# Allegro board LinkingInterfaceV2_0.brd
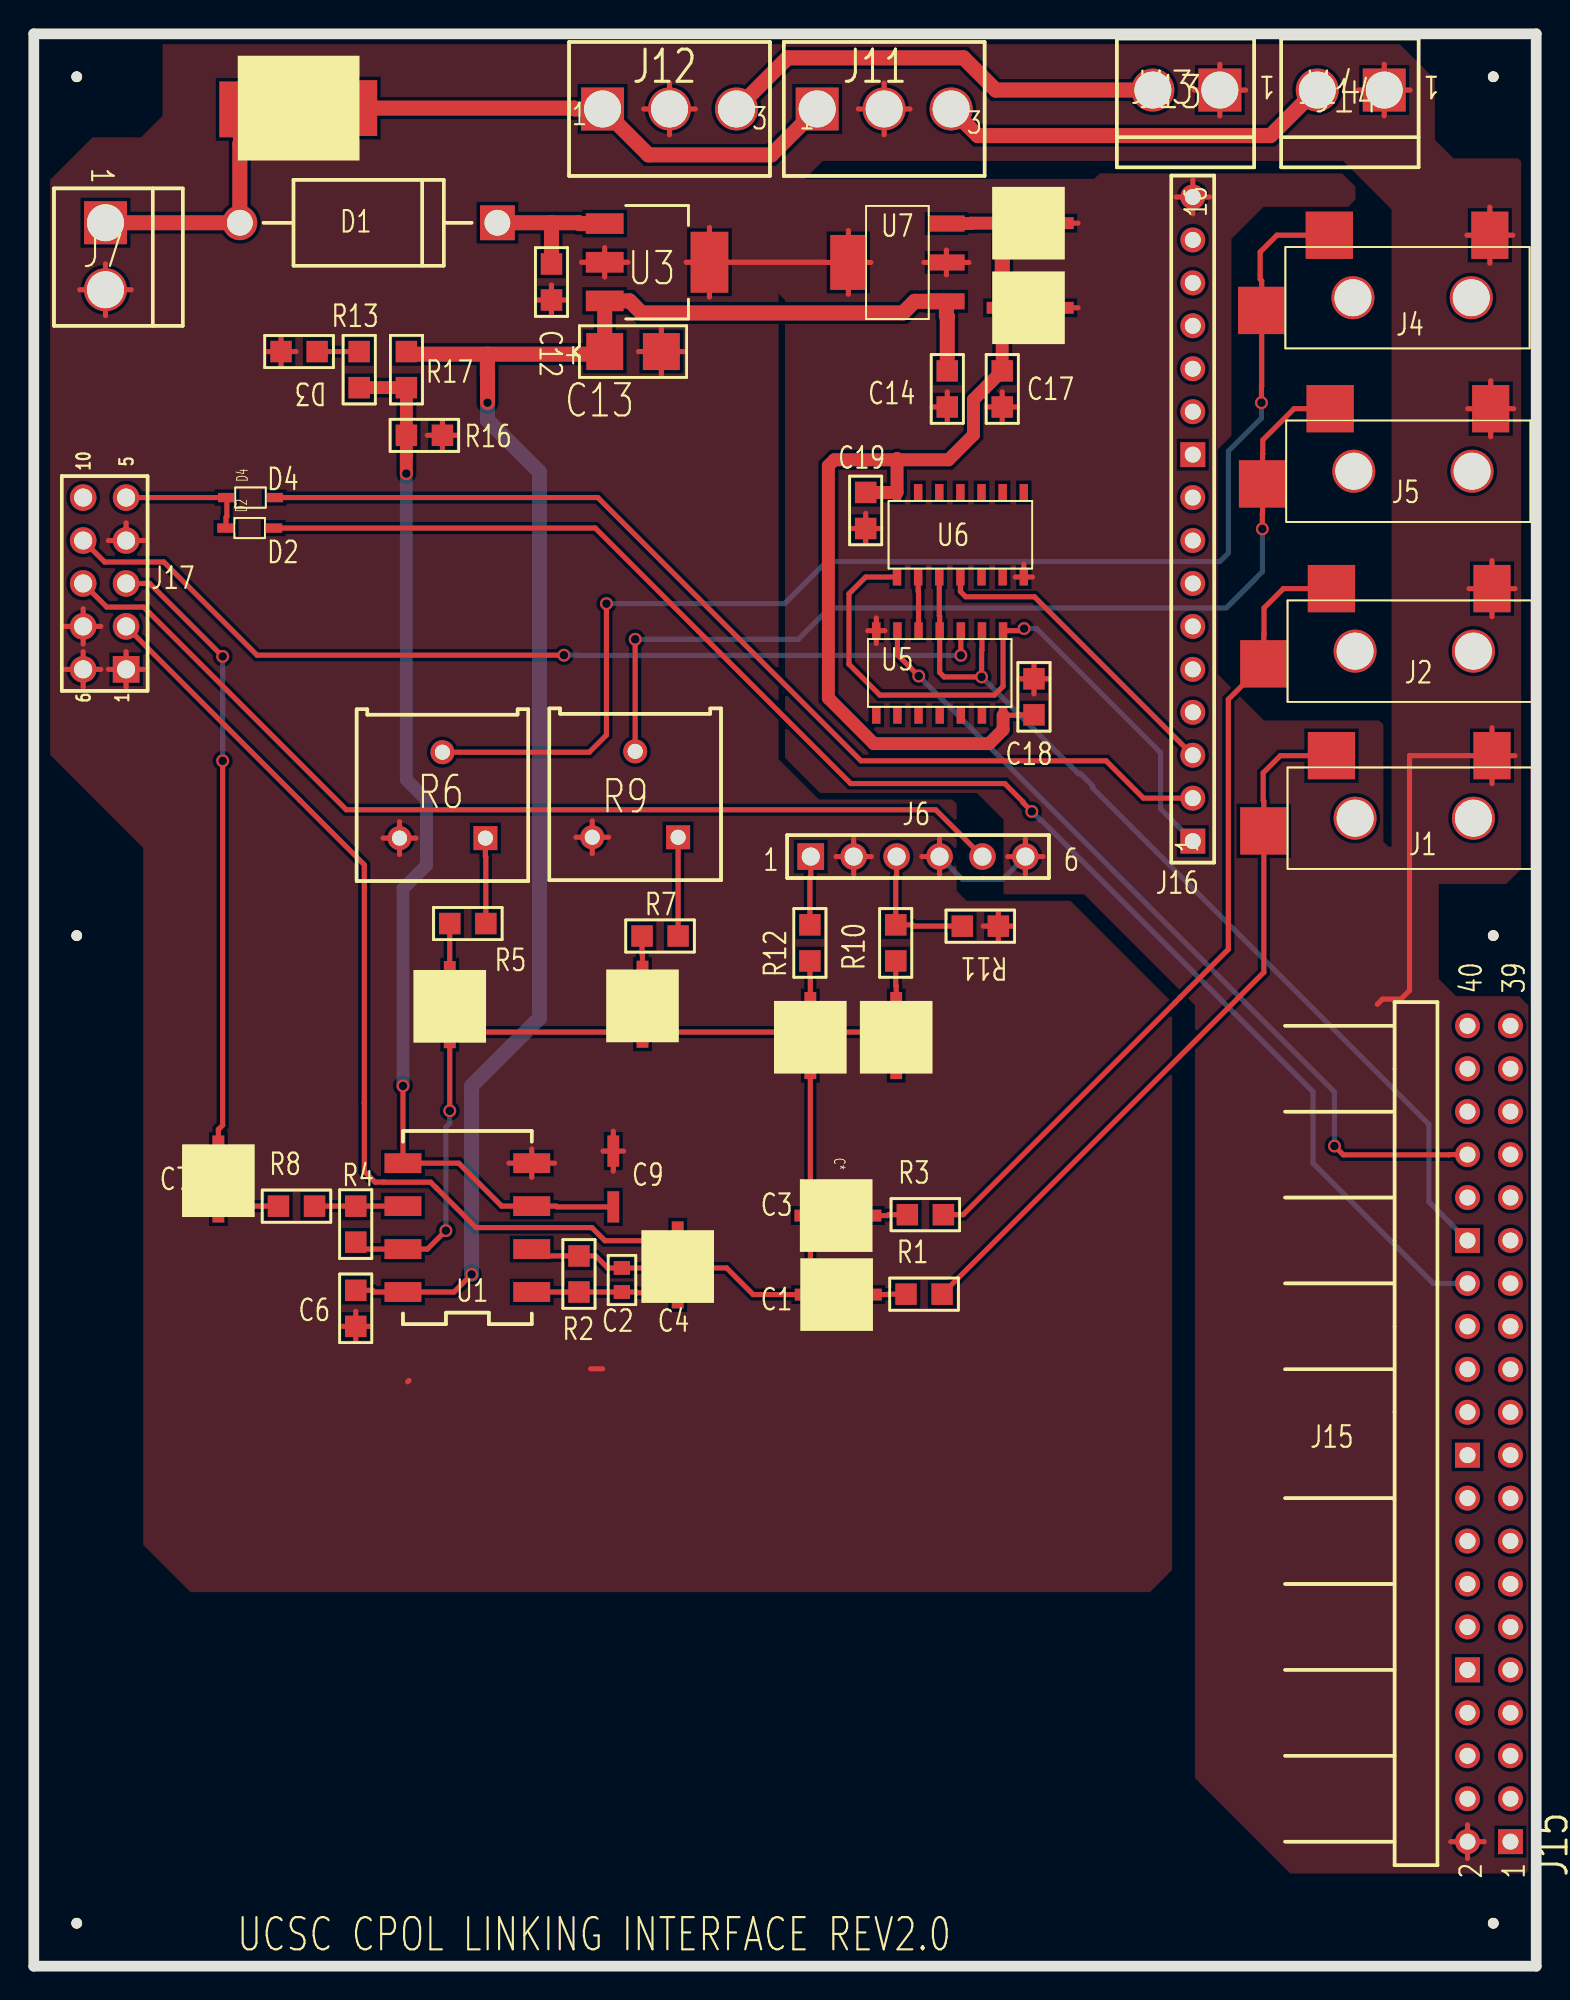
[diagram p0: board, top side]
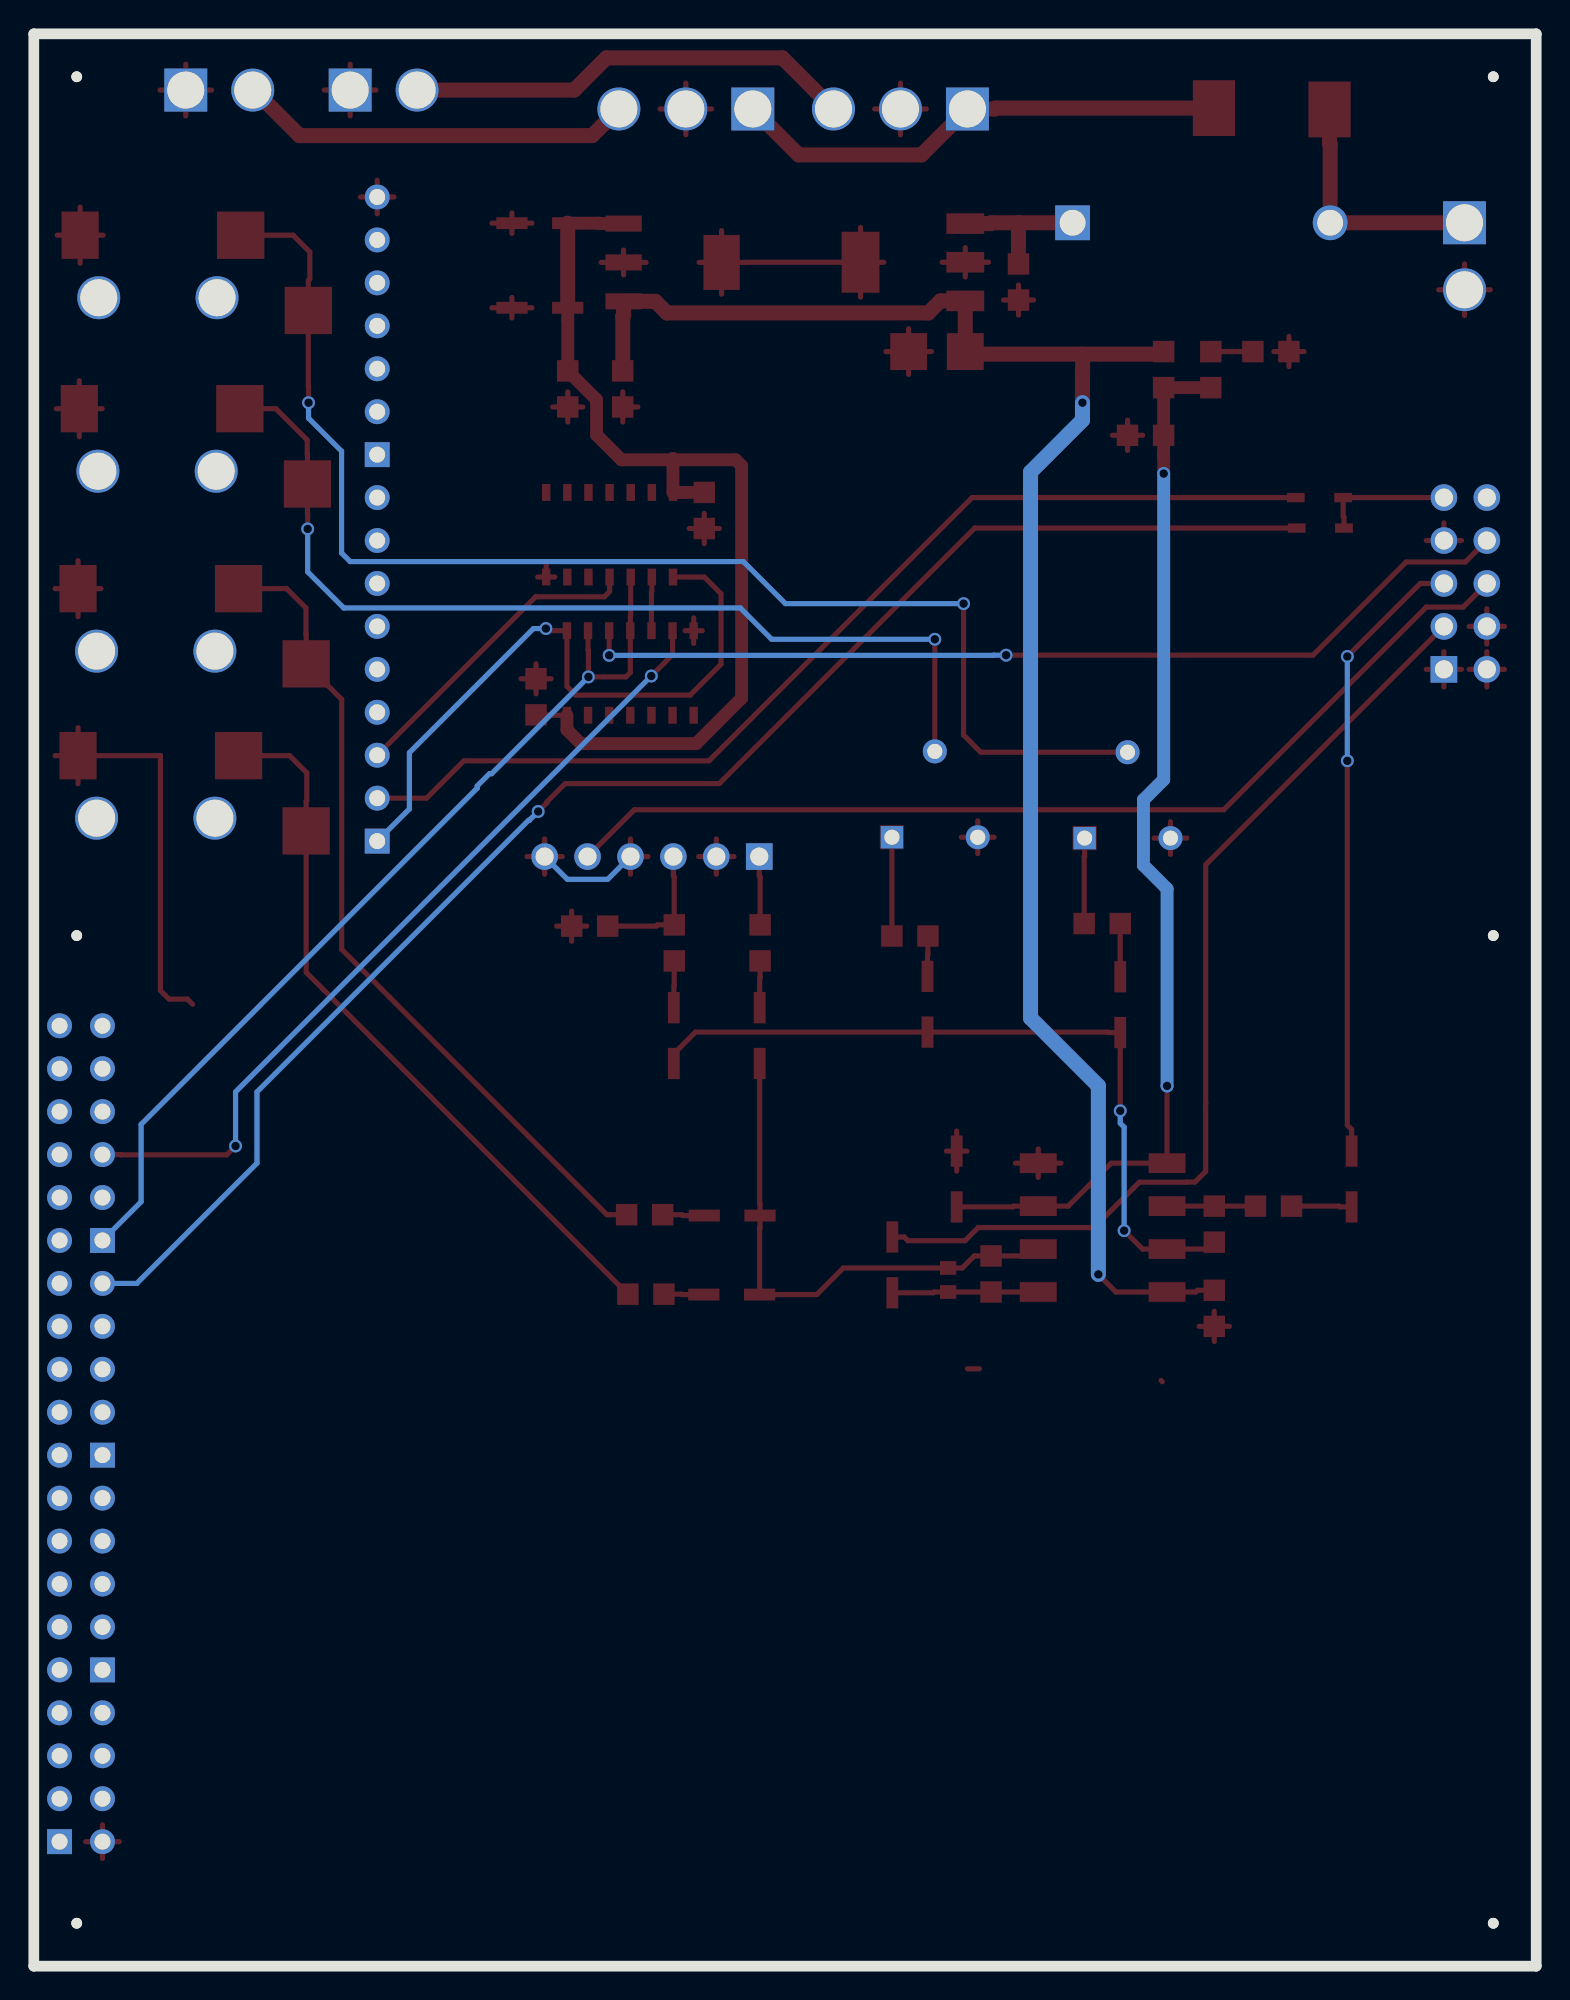
[diagram p1: board, bottom side, seen from below]

Outline 88.9 x 114.3 mm; copper layers: TOP, BOTTOM. Coordinates in mm from the lower left corner of the outline.
Outline path: rectangle 0,0 88.9,114.3 ; 0,114.3 88.9,114.3 ; 0,114.3 88.9,114.3 ; 0,114.3 0,0 ; 0,114.3 0,0 ; 88.9,114.3 88.9,0 ; 88.9,114.3 88.9,0 ; 0,0 88.9,0 ; 0,0 88.9,0

## Placement (name value [footprint] x y rotation side)
C1  10uF  [1_UF_CAP]  46.25 39.73 270 top
C2  100pF  [SMC0603]  34.8 39.88 90 top
C3  10uF  [1_UF_CAP]  46.23 44.4 270 top
C4  10uF  [1_UF_CAP]  38.1 40.13 0 top
C5  10uF  [1_UF_CAP]  24.61 55.52 0 top
C6  100nF  [SMC0805]  19.05 37.85 90 top
C7  1uF  [1_UF_CAP]  10.92 45.21 0 top
C8  10uF  [1_UF_CAP]  36.02 55.55 0 top
C9  4.7uF  [1_UF_CAP]  34.29 45.21 0 top
C10  10uF  [1_UF_CAP]  51.03 53.7 0 top
C11  10uF  [1_UF_CAP]  45.95 53.7 0 top
C12  470nF  [SMC0805]  30.63 100.69 270 top
C13  22uF/Tant  [EIAB_SMCT3528_12]  33.78 95.5 0 top
C14  100nF  [SMC0805]  54.05 92.23 90 top
C15  10uF  [1_UF_CAP]  57.61 103.1 270 top
C16  10uF  [1_UF_CAP]  57.61 98.09 270 top
C17  100nF  [SMC0805]  57.3 92.23 90 top
C18  100nF  [SMC0805]  59.18 76.15 270 top
C19  100nF  [SMC0805]  49.23 87.17 270 top
D1  SB1245  [DAX600_60D]  12.19 103.12 0 top
D2  1N4148  [1N4148_SOD523]  14.17 85.06 90 top
D3  RED  [SMR0805]  16.76 95.5 180 top
D4  1N4148  [1N4148_SOD523]  14.22 86.87 90 top
D5  -  [B320]  12.27 109.91 0 top
J1  TX_Echo  [35MMJACK]  86.33 71.65 0 top
J2  TX_Allstar  [35MMJACK]  86.33 81.53 0 top
J4  RX_Echo  [35MMJACK]  86.21 102.44 0 top
J5  Rx_Allstar  [35MMJACK]  86.26 92.18 0 top
J6  HEADER 6  [BLKCON100VHTM1SQSW1006]  45.97 65.63 0 top
J7  0.156 VH  [BLKCON156_VHTM1SQ_SW156_2]  4.24 103.12 270 top
J11  HEADER 3  [BLKCON156VHTM1SQSW3123]  46.36 109.86 0 top
J12  HEADER 3  [BLKCON156VHTM1SQSW3123]  33.66 109.86 0 top
J13  0.156 VH  [BLKCON156_VHTM1SQ_SW156_2]  70.18 110.97 180 top
J14  0.156 VH  [BLKCON156_VHTM1SQ_SW156_2]  79.91 110.97 180 top
J15  HEADER 20X2  [BLKCON100RHTM2OEW52540]  87.38 7.37 90 top
J16  HEADER 16  [BLKCON100VHTM1SQW10016]  68.58 66.55 90 top
J17  HEADER 9  [BCON2DB9_5X2V_100S_42D]  5.46 76.71 90 top
NOREF  -  [unnamed]  86.36 111.76 180 bottom
NOREF#2  -  [unnamed]  2.54 111.76 180 bottom
NOREF#3  -  [unnamed]  2.54 60.96 180 bottom
NOREF#4  -  [unnamed]  86.36 60.96 180 bottom
NOREF#5  -  [unnamed]  86.36 2.54 180 bottom
NOREF#6  -  [unnamed]  2.54 2.54 180 bottom
R1  51k  [SMR0805]  51.61 39.75 0 top
R2  51k  [SMR0805]  32.26 39.88 90 top
R3  51k  [SMR0805]  51.69 44.45 0 top
R4  51k  [SMR0805]  19.05 44.96 270 top
R5  7.5k  [SMR0805]  24.61 61.67 0 top
R6  10k  [VRES18_35D]  24.18 69.27 180 top
R7  7.5k  [SMR0805]  35.99 60.93 0 top
R8  51k  [SMR0805]  14.48 44.96 0 top
R9  10k  [VRES18_35D]  35.59 69.32 180 top
R10  7.5k  [SMR0805]  51 59.46 90 top
R11  10k  [SMR0805]  57.07 61.52 180 top
R12  51k  [SMR0805]  45.92 59.46 90 top
R13  51k  [SMR0805]  22.05 93.37 90 top
R16  51k  [SMR0805]  24.18 90.55 180 top
R17  120  [SMR0805]  19.25 95.5 270 top
U1  TL072  [DIP100B8W300L450]  29.46 39.88 90 top
U3  LM2940 / SOT223  LDO  [SOT223_1234]  33.78 103.07 270 top
U5  74HC08  [74HC0]  57.35 78.99 180 top
U6  74HC04  [74HC0]  51.08 82.17 0 top
U7  LM2936/SO_5  [LM2936_SOT]  54.05 98.48 90 top

## Library data of the parts
C1 C3 C7 C11 = CAPACITOR POL
C2 C6 C12 C14 C17-C19 = C NP
C4 C5 C8-C10 C15 C16 = CAP POL
C13 = C POL
D1 D5 = DIODE SCHOTTKY_0
D2 D4 = 1N4148
D3 = LED
J1 J2 J4 J5 = PHONE JACK-3_2
J6 = HEADER 6
J7 J13 J14 = HEADER 2_4
J11 J12 = HEADER 3
J15 = HEADER 20X2
J16 = HEADER 16
J17 = HEADER 9
R1-R5 R7 R8 R10-R13 R16 R17 = RESISTOR
R6 R9 = POT
U1 = TL072_0
U3 = 78L05/TO92_0
U5 = 74HC08_4
U6 = 74HC04_5
U7 = LM2936/SO_13

## Footprints (pads in the part's own frame, mm; a bottom-side part is the same pattern mirrored in y, then rotated)
1_UF_CAP
  rect 0.701x1.849 smd: 1(0,-0.3) 2(0,3)
1N4148_SOD523
  rect 0.551x1.049 smd: 1(0,0) 2(0,2.799)
35MMJACK
  round 2.54 hole 2.184: (-8.151,-3.749) (-1.151,-3.749)
  rect 2.2x2.799 smd: 1(-0.051,-0.051)
  rect 2.799x2.799 smd: 2(-9.55,-0.051) 3(-13.551,-4.501)
74HC0
  rect 0.5x1.001 smd: 1(0,0) 2(1.25,0) 3(2.499,0) 4(3.749,0) 5(5.001,0) 6(6.251,0) 7(7.501,0) 8(7.501,5.001) 9(6.251,5.001) 10(5.001,5.001) 11(3.749,5.001) 12(2.499,5.001) 13(1.25,5.001) 14(0,5.001)
B320
  rect 2.499x3.299 smd: 1(-0.041,-0.079) 2(6.8,0)
BCON2DB9_5X2V_100S_42D
  round 1.575 hole 1.067: (10.16,2.54) 2(2.54,0) 3(5.08,0) 4(7.62,0) 5(10.16,0) 6(0,2.54) 7(2.54,2.54) 8(5.08,2.54) 9(7.62,2.54)
  rect 1.575x1.575 hole 1.067: 1(0,0)
BLKCON100RHTM2OEW52540
  rect 1.473x1.473 hole 0.94: 1(0,0) 10(10.16,2.54) 20(22.86,2.54) 30(35.56,2.54)
  round 1.473 hole 0.94: 2(0,2.54) 3(2.54,0) 4(2.54,2.54) 5(5.08,0) 6(5.08,2.54) 7(7.62,0) 8(7.62,2.54) 9(10.16,0) 11(12.7,0) 12(12.7,2.54) 13(15.24,0) 14(15.24,2.54) 15(17.78,0) 16(17.78,2.54) 17(20.32,0) 18(20.32,2.54) 19(22.86,0) 21(25.4,0) 22(25.4,2.54) 23(27.94,0) 24(27.94,2.54) 25(30.48,0) 26(30.48,2.54) 27(33.02,0) 28(33.02,2.54) 29(35.56,0) 31(38.1,0) 32(38.1,2.54) 33(40.64,0) 34(40.64,2.54) 35(43.18,0) 36(43.18,2.54) 37(45.72,0) 38(45.72,2.54) 39(48.26,0) 40(48.26,2.54)
BLKCON100VHTM1SQSW1006
  rect 1.575x1.575 hole 1.067: 1(0,0)
  round 1.575 hole 1.067: 2(2.54,0) 3(5.08,0) 4(7.62,0) 5(10.16,0) 6(12.7,0)
BLKCON100VHTM1SQW10016
  rect 1.473x1.473 hole 0.94: 1(0,0) 10(22.86,0)
  round 1.473 hole 0.94: 2(2.54,0) 3(5.08,0) 4(7.62,0) 5(10.16,0) 6(12.7,0) 7(15.24,0) 8(17.78,0) 9(20.32,0) 11(25.4,0) 12(27.94,0) 13(30.48,0) 14(33.02,0) 15(35.56,0) 16(38.1,0)
BLKCON156_VHTM1SQ_SW156_2
  rect 2.54x2.54 hole 2.184: 1(0,0)
  round 2.54 hole 2.184: 2(3.962,0)
BLKCON156VHTM1SQSW3123
  rect 2.54x2.54 hole 2.184: 1(0,0)
  round 2.54 hole 2.184: 2(3.962,0) 3(7.925,0)
DAX600_60D
  round 2.057 hole 1.524: 1(0,0)
  rect 2.057x2.057 hole 1.524: 2(15.24,0)
DIP100B8W300L450
  rect 1.168x2.184 smd: 1(0,0) 2(2.54,0) 3(5.08,0) 4(7.62,0) 5(7.62,7.62) 6(5.08,7.62) 7(2.54,7.62) 8(0,7.62)
EIAB_SMCT3528_12
  rect 2.184x2.184 smd: 1(0,0) 2(3.353,0)
LM2936_SOT
  rect 0.95x2.149 smd: 1(0,0.051) 2(2.301,0.051) 3(4.6,0.051)
  rect 3.251x2.149 smd: 4(2.301,5.85)
SMC0603
  rect 0.813x0.965 smd: 1(0,0) 2(1.422,0)
SMC0805
  rect 1.27x1.27 smd: 1(0,0) 2(2.134,0)
SMR0805
  rect 1.27x1.27 smd: 1(0,0) 2(2.134,0)
SOT223_1234
  rect 1.219x2.235 smd: 1(0,0) 2(2.286,0) 3(4.572,0)
  rect 3.607x2.235 smd: 4(2.286,6.198)
unnamed
  round 0.635 hole 3.175 unplated: (0,0)
VRES18_35D
  rect 1.422x1.422 hole 0.889: 1(-2.54,2.54)
  round 1.422 hole 0.889: 2(0,-2.54) 3(2.54,2.54)

## Nets
+3.3V: C15.1 C16.1 C17.2(B) C18.2(B) C19.1(A) U5.14(+3.3V) U6.14(+3.3V) U7.3(+3.3V)
+4.5V: C9.1 R13.1 R16.2 R17.2 U1.3(+IN) U1.5(+IN)
+9V: C6.2(B) C13.1(P) C14.2(B) R13.2 U1.8(+9V) U3.3(+9V) U7.1(+9V)
GND: C6.1(A) C9.2 C12.2(B) C13.2(N) C14.1(A) C15.2 C16.2 C17.1(A) C18.1(A) C19.2(B) D3.2(CATHODE) J1.1 J2.1 J4.1 J5.1 J6.2 J6.4 J6.6 J7.2 J11.2 J12.2 J13.1 J14.1 J15.2 J16.16 J17.1 J17.4 J17.6 J17.7 R6.3(B) R9.3(B) R11.1 R16.1 U1.4(GND) U3.2(G1) U3.4(G2) U5.7(GND) U6.7(GND) U7.2(GND#2) U7.4(GND#4)
AUDIO_AUX: C7.2 J17.3
AUDIOOUT: C4.2 J17.2
COS: D2.2 D4.2 J17.5
COS_ALLSTAR: D4.1 J16.2
DTMF_AUDIO: J6.3 R10.2 R11.2
DTMF_TONE_CONFIRMATION: J6.1 R12.2
INHIBIT: J6.5 J17.8
PTT: J17.9 U5.3(Y)
PTT_A: J16.1 U5.1(A) U6.1(A)
PTT_E: J15.30 U5.2(B) U5.4(A) U6.3(A)
RX_A: J5.2 J5.3 R9.2(WIPER)
RX_E: J4.2 J4.3 R6.2(WIPER)
TX_A: J2.2 J2.3 R3.2
N88559: C1.1 C2.2(B) C3.1 C11.1 R2.2 U1.2(-IN)
N88575: C2.1(A) C4.1 R2.1 U1.1(OUT)
N89923: C5.1 C8.1 C10.1 R4.2 U1.7(OUT)
N90145: C1.2 R1.1
N90149: C3.2 R3.1
N90849: R4.1 R8.2 U1.6(-IN)
N96497: J15.34 U5.6(Y)
N134507: C5.2 R5.1
N134567: C10.2 R10.1
N134575: C8.2 R7.1
N134810: R5.2 R6.1(A)
N196050: J1.2 J1.3 R1.2
N904010: R7.2 R9.1(A)
N908810: C7.1 R8.1
N14521945: C12.1(A) D1.2(CATHODE) U3.1(IN)
N14538770: D1.1(ANODE) D5.1(ANODE) J7.1
N14545130: J16.3 U6.4(Y)
N14551484: D2.1 J15.28
N14551658: C11.2 R12.1
N14597991: U5.5(B) U6.2(Y)
N14601468: D5.2(CATHODE) J11.1 J12.1
N14603309: J11.3 J14.2
N14603313: J12.3 J13.2
N145714160: D3.1(ANODE) R17.1

Pads without a net: J15 1 3 4 5 6 7 8 9 10 11 12 13 14 15 16 17 18 19 20 21 22 23 24 25 26 27 29 31 32 33 35 36 37 38 39 40; J16 4 5 6 7 8 9 10 11 12 13 14 15; U5 8 9 10 11 12 13; U6 5 6 8 9 10 11 12 13

## Via types
v1: diameter 0.762, hole 0.508, TOP to BOTTOM, 19 vias

## Routing (per net, layer and track width the routed paths; a pad name or vN(x,y) marks a point on that pad's centre or on a via; arc(x,y) is an arc through that point)
+3.3V: length 58.1
  TOP w0.305: C18.2 58.19,74.02 58.17,73.99 U5.14
  TOP w0.762: U5.14 57.35,73.14 56.53,72.31 49.71,72.31 47.02,75.01 47.02,88.75 47.37,89.1 51,89.1 ; C16.1 57.31,97.39 57.3,97.38 C17.2 55.6,92.66 55.6,90.58 54.13,89.1 51,89.1 ; 51,89.1 51.08,89.18 U6.14 50.47,87.17 50.47,87.17 C19.1 ; C15.1 55.45,103.1 55.43,103.08 U7.3
  TOP w0.889: C15.1 C16.1
+4.5V: length 63.3
  TOP w0.305: v1(21.84,52.07) U1.5 25.15,47.5 27.69,44.96 U1.3 30.91,44.96 30.96,44.91 C9.1
  TOP w0.762: v1(22.04,88.29) 22.04,89.33 22.05,89.33 R16.2 R13.1 R17.2
  BOTTOM w0.762: v1(22.04,88.29) 22.04,70.19 23.24,68.99 23.24,65.13 21.84,63.73 v1(21.84,52.07)
+9V: length 104.5
  TOP w0.305: 26.84,95.32 26.87,95.35 ; v1(25.91,40.92) 24.87,39.88 U1.8 20.14,39.88 20.04,39.98 C6.2
  TOP w0.889: 34.46,98.5 U3.3 C13.1 33.63,95.35 22.2,95.35 R13.2 ; 34.46,98.5 34.46,98.5 ; 34.46,98.5 35.26,98.5 35.97,97.79 51.44,97.79 52.12,98.48 U7.1 54,97.65 54.05,97.59 C14.2 ; 26.84,95.32 26.84,94.19 26.85,94.18 v1(26.85,92.48)
  BOTTOM w0.889: v1(25.91,40.92) 25.91,52.07 29.92,56.08 29.92,88.38 26.85,91.45 v1(26.85,92.48)
GND: length 207.6
  TOP w0.305: U6.7 58.58,82.93 ; U6.7 58.07,82.17 ; U6.7 59.09,82.17 ; 57.07,60.63 R11.1 ; R11.1 57.07,62.41 ; R11.1 57.97,61.52 ; R11.1 56.18,61.52 ; 1.88,79.25 J17.7 ; J17.7 2.92,80.29 ; J17.7 2.92,78.2 ; J17.7 3.96,79.25 ; J6.6 58.67,66.68 ; J6.6 58.67,64.59 ; J6.6 57.63,65.63 ; J6.6 59.72,65.63 ; J4.1 87.51,102.39 ; J4.1 86.16,104.04 ; J4.1 84.8,102.39 ; J4.1 86.16,100.73 ; J17.4 5.46,85.37 ; J17.4 4.42,84.33 ; J17.4 6.5,84.33 ; 56.41,92.23 C17.1 ; C17.1 58.19,92.23 ; C17.1 57.3,93.12 ; C17.1 57.3,91.34 ; 54,100.05 U7.2 ; U7.2 52.67,100.78 ; U7.2 54,101.51 ; U7.2 55.33,100.78 ; 84.84,6.37 J15.2 ; J15.2 83.84,7.37 ; J15.2 84.84,8.36 ; J15.2 85.83,7.37 ; U7.4 49.53,100.78 ; U7.4 48.2,98.89 ; U7.4 46.77,100.78 46.76,100.79 U3.4 ; U7.4 48.2,102.66 ; C12.2 31.52,98.55 ; C12.2 29.74,98.55 ; C12.2 30.63,97.66 ; C12.2 30.63,99.44 ; J16.16 68.58,105.64 ; J16.16 67.59,104.65 ; J16.16 69.57,104.65 ; J16.16 68.58,103.65 ; 59.18,75.26 C18.1 ; C18.1 60.07,76.15 ; C18.1 59.18,77.04 ; C18.1 58.29,76.15 ; 48.79,109.86 J11.2 ; J11.2 50.32,108.33 ; J11.2 50.32,111.38 ; J11.2 51.84,109.86 ; U3.4 39.98,98.73 ; U3.4 38.61,100.79 ; U3.4 39.98,102.85 ; 4.24,97.64 J7.2 ; J7.2 5.77,99.16 ; J7.2 4.24,100.69 ; J7.2 2.72,99.16 ; D3.2 15.52,95.5 ; D3.2 14.63,96.4 ; D3.2 13.74,95.5 ; D3.2 14.63,94.61 ; 24.18,89.66 R16.1 ; R16.1 25.07,90.55 ; R16.1 24.18,91.44 ; R16.1 23.29,90.55 ; C9.2 34.9,48.21 ; C9.2 34.29,47.03 ; C9.2 34.29,49.39 ; C9.2 33.68,48.21 ; J17.1 6.5,76.71 ; J17.1 5.46,75.66 ; J17.1 4.42,76.71 ; J17.1 5.46,77.75 ; 48.51,64.59 J6.2 ; J6.2 47.47,65.63 ; J6.2 49.56,65.63 ; J6.2 48.51,66.68 ; C13.2 37.13,96.85 ; C13.2 37.13,94.16 ; C13.2 38.48,95.5 ; C13.2 35.79,95.5 ; U3.2 33.78,101.65 ; U3.2 32.41,100.79 ; U3.2 35.16,100.79 ; U3.2 33.78,99.92 ; J1.1 87.64,71.6 ; J1.1 86.28,69.95 ; J1.1 81.41,71.6 81.41,57.71 80.9,57.2 79.81,57.2 79.5,56.9 ; J1.1 86.28,73.26 ; J13.1 71.71,110.97 ; J13.1 70.18,112.5 ; J13.1 70.18,109.45 ; J13.1 68.65,110.97 ; C15.2 60.61,103.71 ; C15.2 60.61,102.49 ; C15.2 61.79,103.1 ; C15.2 59.43,103.1 ; R6.3 21.64,67.69 ; R6.3 20.67,66.73 ; R6.3 22.61,66.73 ; R6.3 21.64,65.76 ; 59.43,98.09 C16.2 ; C16.2 61.79,98.09 ; C16.2 60.61,97.49 ; C16.2 60.61,98.7 ; 49.85,78.24 U5.7 ; U5.7 50.36,78.99 ; U5.7 49.85,79.75 ; U5.7 49.34,78.99 ; C19.2 50.12,85.04 ; C19.2 48.33,85.04 ; C19.2 49.23,85.93 ; C19.2 49.23,84.15 ; C6.1 19.94,37.85 ; C6.1 18.16,37.85 ; C6.1 19.05,38.74 ; C6.1 19.05,36.95 ; 1.88,76.71 J17.6 ; J17.6 2.92,77.75 ; J17.6 3.96,76.71 ; J17.6 2.92,75.66 ; 28.12,47.5 U1.4 ; U1.4 30.81,47.5 ; U1.4 29.46,46.66 ; U1.4 29.46,48.34 ; 37.62,108.33 J12.2 ; J12.2 36.09,109.86 ; J12.2 37.62,111.38 ; J12.2 39.14,109.86 ; 79.91,109.45 J14.1 ; J14.1 78.38,110.97 ; J14.1 81.43,110.97 ; J14.1 79.91,112.5 ; 22.2,34.65 22.12,34.57 ; R9.3 34.01,66.78 ; R9.3 32.08,66.78 ; R9.3 33.05,65.81 ; R9.3 33.05,67.74 ; 53.16,92.23 C14.1 ; C14.1 54.05,91.34 ; C14.1 54.05,93.12 ; 84.85,92.13 J5.1 ; J5.1 86.21,93.78 ; J5.1 86.21,90.47 ; J5.1 87.56,92.13 ; 84.93,81.48 J2.1 ; J2.1 87.64,81.48 ; J2.1 86.28,79.83 ; J2.1 86.28,83.14 ; J6.4 53.59,66.68 ; J6.4 52.55,65.63 ; J6.4 53.59,64.59 ; 33.66,35.33 32.95,35.33
  BOTTOM w0.305: J6.6 57.33,64.29 54.94,64.29 J6.4
AUDIO_AUX: length 36.9
  TOP w0.305: v1(11.18,77.47) 6.86,81.79 J17.3 ; v1(11.18,71.3) 11.18,49.75 10.92,49.49 C7.2
  BOTTOM w0.305: v1(11.18,71.3) v1(11.18,77.47)
AUDIOOUT: length 58.4
  TOP w0.305: J17.2 15.75,68.96 15.75,68.96 19.56,65.15 19.56,51.06 19.56,51.05 19.56,47.01 20.19,46.38 20.7,46.38 20.71,46.37 23.48,46.37 23.83,46.02 23.83,46.02 26.16,43.69 33.02,43.69 33.79,42.91 37.18,42.91 37.39,43.13 C4.2
COS: length 7.8
  TOP w0.305: D2.2 11.37,85.7 11.42,85.75 D4.2 J17.5
COS_ALLSTAR: length 61.7
  TOP w0.305: J16.2 65.66,69.09 63.45,71.3 48.95,71.3 33.38,86.87 D4.1
DTMF_AUDIO: length 8
  TOP w0.305: J6.3 51.05,64.49 51,64.44 R10.2 51.99,61.59 52.07,61.52 R11.2
DTMF_TONE_CONFIRMATION: length 4.1
  TOP w0.305: J6.1 45.97,64.49 45.92,64.44 R12.2
INHIBIT: length 59.9
  TOP w0.305: J17.8 4.32,80.39 6.5,80.39 18.49,68.4 53.37,68.4 J6.5
PTT: length 56.2
  TOP w0.305: J17.9 4.19,83.06 7.7,83.06 13.21,77.55 v1(31.37,77.55) ; v1(54.85,77.54) U5.3
  BOTTOM w0.305: v1(54.85,77.54) 32.12,77.54 32.11,77.55 v1(31.37,77.55)
PTT_A: length 39.2
  TOP w0.305: v1(58.6,79.12) 58.47,78.99 U5.1 57.35,75.7 56.83,75.18 50.06,75.18 48.23,77.01 48.23,81.18 49.23,82.17 U6.1
  BOTTOM w0.305: v1(58.6,79.12) 59.33,79.12 66.68,71.78 66.68,68.45 J16.1
PTT_E: length 56.3
  TOP w0.305: U5.2 56.1,77.85 56.08,77.83 v1(56.08,76.26) 53.86,76.26 53.6,76.52 U5.4 53.6,79.85 53.58,79.88 U6.3
  BOTTOM w0.305: v1(56.08,76.26) 61.81,70.54 61.94,70.54 62.66,69.81 62.66,69.68 82.55,49.79 82.55,45.21 J15.30
RX_A: length 58
  TOP w0.305: J5.2 74.57,92.13 72.72,90.27 72.72,89.44 72.71,89.43 J5.3 72.71,85.92 72.69,85.91 v1(72.69,85.01) ; R9.2 v1(35.59,78.49)
  BOTTOM w0.305: v1(35.59,78.49) 45.24,78.49 47.09,80.34 70.56,80.34 72.69,82.47 v1(72.69,85.01)
RX_E: length 79.1
  TOP w0.305: R6.2 32.87,71.81 33.88,72.82 v1(33.88,80.59) ; v1(72.64,92.48) 72.64,93.45 72.66,93.46 J4.3 72.66,99.69 72.57,99.78 72.57,101.4 73.56,102.39 J4.2
  BOTTOM w0.305: v1(33.88,80.59) 44.42,80.59 46.91,83.08 70.18,83.08 70.69,83.59 70.69,89.61 72.64,91.57 v1(72.64,92.48)
TX_A: length 48.9
  TOP w0.305: J2.2 73.94,81.48 72.8,80.34 72.8,78.8 72.78,78.79 J2.3 70.68,74.93 70.68,60.14 68.35,57.82 67.85,57.32 67.85,57.32 67.55,57.02 54.99,44.45 54.82,44.45 54.81,44.45 R3.2
N88559: length 31.3
  TOP w0.305: C11.1 45.95,45.13 45.93,45.11 C3.1 45.93,43.69 45.95,43.67 C1.1 42.57,39.73 41,41.3 C2.2 33.96,41.3 33.25,42.01 R2.2 29.87,42.01 U1.2
N88575: length 8.7
  TOP w0.305: C4.1 35.68,39.83 35.64,39.88 C2.1 R2.1 U1.1
N89923: length 45.3
  TOP w0.305: C10.1 51.03,53.97 49.75,55.25 C8.1 25.34,55.25 25.32,55.22 C5.1 v1(24.61,50.6) ; v1(24.38,43.51) 23.29,42.42 U1.7 19.46,42.42 R4.2
  BOTTOM w0.305: v1(24.38,43.51) 24.38,49.63 24.61,49.86 v1(24.61,50.6)
N90145: length 2.4
  TOP w0.305: C1.2 50.53,39.73 50.56,39.75 R1.1
N90149: length 2.5
  TOP w0.305: C3.2 50.51,44.4 50.56,44.45 R3.1
N90849: length 5.2
  TOP w0.305: U1.6 R4.1 R8.2
N96497: length 49.3
  TOP w0.305: v1(76.96,48.51) 77.49,47.99 83.73,47.99 83.74,48.01 J15.34 ; U5.6 51.1,77.57 v1(52.36,76.31)
  BOTTOM w0.305: v1(76.96,48.51) 76.96,51.71 v1(52.36,76.31)
N134507: length 3.1
  TOP w0.305: R5.1 C5.2
N134567: length 2.8
  TOP w0.305: R10.1 51,58 51.03,57.98 C10.2
N134575: length 2.4
  TOP w0.305: C8.2 36.02,59.83 35.99,59.86 R7.1
N134810: length 5.1
  TOP w0.305: R5.2 26.75,65.63 26.72,65.66 R6.1
N196050: length 43.2
  TOP w0.305: J1.2 73.76,71.6 72.75,70.59 72.75,68.95 72.78,68.91 J1.3 72.78,58.79 R1.2
N904010: length 5.8
  TOP w0.305: R9.1 R7.2
N908810: length 3.6
  TOP w0.305: R8.1 11.67,44.96 11.63,44.91 C7.1
N14521945: length 8.8
  TOP w0.889: C12.1 30.63,103.1 30.61,103.12 ; 30.61,103.12 D1.2 ; 30.61,103.12 32.26,103.12 32.31,103.07 U3.1
N14538770: length 14.7
  TOP w0.889: D5.1 12.23,107.82 12.19,107.78 D1.1 J7.1
N14545130: length 18.6
  TOP w0.305: J16.3 59.21,81 55.14,81 54.83,81.31 U6.4
N14551484: length 91.7
  TOP w0.305: v1(59.06,68.3) 58.53,68.82 58.53,68.87 57.45,69.95 48.34,69.95 33.22,85.06 D2.1
  BOTTOM w0.305: v1(59.06,68.3) 59.58,67.78 59.63,67.78 75.69,51.71 75.69,47.5 82.8,40.39 J15.28
N14551658: length 2.8
  TOP w0.305: R12.1 45.92,58.47 45.95,58.45 C11.2
N14597991: length 3.2
  TOP w0.305: U6.2 52.33,81.31 52.35,81.29 U5.5
N14601468: length 29.6
  TOP w0.889: D5.2 31.98,109.91 32.03,109.86 J12.1 36.37,107.14 43.64,107.14 J11.1
N14603309: length 23.4
  TOP w0.889: J11.3 55.85,108.28 73.18,108.28 75.87,110.97 J14.2
N14603313: length 26.7
  TOP w0.889: J12.3 44.6,112.88 55.02,112.88 56.92,110.97 J13.2
N145714160: length 2.5
  TOP w0.305: D3.1 R17.1

## Copper pours and planes (outline as drawn; the poured copper is in the pictures)
GND on TOP: 7.62,113.69 80.82,113.69 82.91,111.61 82.91,108.03 84,106.93 87.83,106.93 88.01,106.76 88.01,64.9 87.12,64.01 80.52,64.01 80.34,64.19 80.34,103.91 77.47,106.78 46.69,106.78 44.07,104.17 44.07,71.4 46.46,69.01 54.36,69.01 54.61,68.76 54.61,63.6 55.19,63.02 61.34,63.02 67.36,57 67.36,23.44 66.04,22.12 9.27,22.12 6.48,24.92 6.48,66.14 0.97,71.65 0.97,105.66 3.48,108.18 6.35,108.18 7.62,109.45
GND on TOP: 88.27,5.49 74.35,5.49 68.71,11.13 68.71,56.85 62.15,63.4 57.43,63.4 57.38,63.45 57.38,67.82 55.8,69.39 46.58,69.39 46.56,69.37 44.45,71.48 44.45,98.55 43.81,99.19 43.81,104.29 45.24,105.71 62.74,105.71 63.07,106.05 77.42,106.05 78.21,105.26 78.21,104.5 77.77,104.06 72.77,104.06 70.87,102.16 70.87,90.53 70.05,89.71 70.05,76.43 72.8,73.69 79.6,73.69 79.86,73.43 79.86,66.52 80.16,66.22 81.1,66.22 83.13,64.19 83.13,58.39 84.15,57.38 87.88,57.38 88.44,56.82 88.44,5.66

## Text on the board
Board Geometry/Soldermask Bottom: SMB
Ref Des/Silkscreen Bottom: SSB
TOP: TOP
Board Geometry/Soldermask Top: SMT
Ref Des/Silkscreen Top: C7 | D4 | D2 | C5 | U1 | C2 | C8 | C9 | C4 | C3 | C1 | C11 | C10 | U7 | U5 | J6 | U6 | C15 | C16 | J16 | J15 | J5 | J4 | J2 | J1 | SST | UCSC CPOL LINKING INTERFACE REV2.0
COMPVAL_TYPE_TOP: FIGURE | SIZE | 86.0 | 60.0 | 42.0 | 37.0 | 35.0 | 20.0 | 125.0 | DRILL CHART: TOP to BOTTOM | ALL UNITS ARE IN MILS | PLATED | NON-PLATED | QTY | 8 | 12 | 1 | 16 | 56 | 6 | 19
User.5: BOTTOM
User.6: MECH
